# Allegro board ET4207DeMO.brd
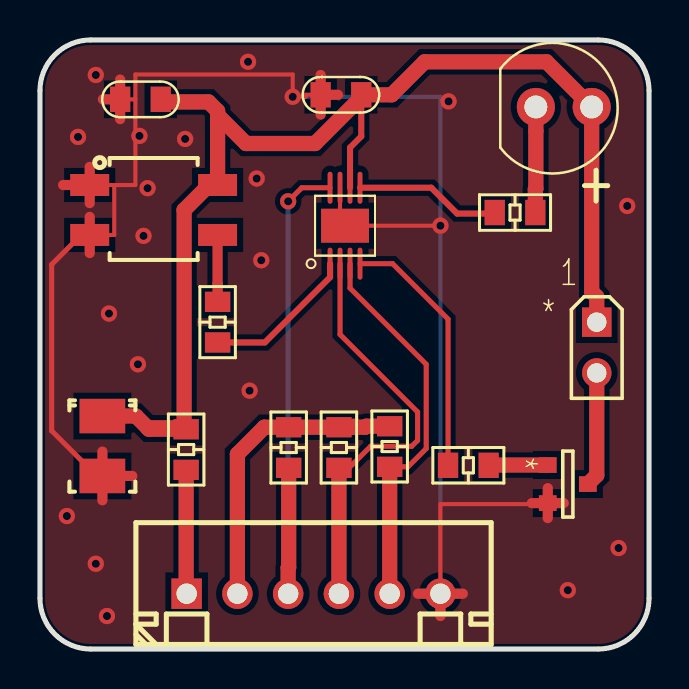
[diagram p0: board, top side]
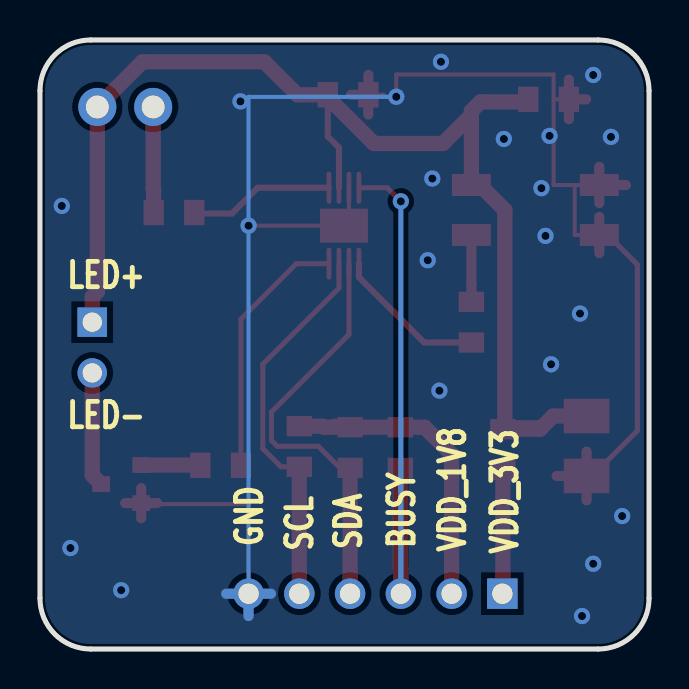
[diagram p1: board, bottom side, seen from below]

Outline 30.48 x 30.48 mm; copper layers: TOP, BOTTOM. Coordinates in mm from the lower left corner of the outline.
Outline path: 0,27.94 0,2.54 arc(0.74,0.74) 2.54,0 27.94,0 arc(29.74,0.74) 30.48,2.54 30.48,27.94 arc(29.74,29.74) 27.94,30.48 2.54,30.48 arc(0.74,29.74) 0,27.94

## Placement (name value [footprint] x y rotation side)
C6  0.1uF  [SC0805]  5.03 27.51 180 top
C7  0.1uF  [SC0805]  15.06 27.74 180 top
CT2  22uF  [STC3528A]  3.12 10.16 270 top
D7  LED  [LED_0805D]  24.82 27.13 0 top
J1  CON6  [HX6V]  7.34 2.77 90 top
J13  HEADER_2  [HDR_THVT_1X2_100_M]  27.86 16.36 0 top
Q1  BSS138LT3G  [SOT_23_321]  26.42 8.26 270 top
R8  100R  [SR0805]  8.89 16.36 90 top
R14  2R2  [SR0805]  23.77 21.84 180 top
R15  0R  [SR0805]  7.32 9.98 270 top
R16  4K7  [SR0805]  17.5 10.13 90 top
R17  4K7  [SR0805]  12.45 10.08 90 top
R18  4K7  [SR0805]  14.96 10.08 90 top
R19  4K7  [SR0805]  21.44 9.19 180 top
U1  ET4003YD  [DFN8]  13.77 19.68 0 top
U3  HIM-H600  [LEDSC254P435X510X80-4N]  5.69 22.02 0 top

## Library data of the parts
C6 C7 = CAPACITOR NON-POL
CT2 = CAP POL
D7 = LED_3
J1 = CON6
J13 = HEADER_1X2
Q1 = MOSFET_I_EN_GSD
R8 R14-R19 = RESISTOR
U1 = LPC111x_8
U3 = LPC111x_7

## Footprints (pads in the part's own frame, mm; a bottom-side part is the same pattern mirrored in y, then rotated)
DFN8
  oval 0.24x1.6 smd: 1(0.75,-0.4) 2(1.25,-0.4) 3(1.75,-0.4) 4(2.25,-0.4) 5(2.25,3.4) 6(1.75,3.4) 7(1.25,3.4) 8(0.75,3.4)
  rect 2.4x1.7 smd: 9(1.5,1.5)
HDR_THVT_1X2_100_M
  rect 1.473x1.473 hole 0.965: 1(0,0)
  round 1.473 hole 0.965: 2(0,-2.54)
HX6V
  rect 1.524x1.524 hole 1.016: 1(0,0)
  round 1.524 hole 1.016: 2(0,-2.54) 3(0,-5.08) 4(0,-7.62) 5(0,-10.16) 6(0,-12.7)
LED_0805D
  round 1.905 hole 1.143: 1(2.794,0) 2(0,0)
LEDSC254P435X510X80-4N
  rect 1.95x1.1 smd: 1(-3.2,1.2) 2(-3.2,-1.3) 3(3.2,-1.3) 4(3.2,1.2)
SC0805
  rect 1.016x1.27 smd: 1(-1.016,0) 2(1.016,0)
SOT_23_321
  rect 0.787x0.889 smd: 1(-0.953,-1.003) 2(0.953,-1.003) 3(0,1.003)
SR0805
  rect 1.016x1.27 smd: 1(-1.016,0) 2(1.016,0)
STC3528A
  rect 1.727x2.286 smd: 1(-1.499,0) 2(1.499,0)

## Nets
GND: C6.2 C7.2 CT2.2 J1.6 Q1.2(S) U1.7(GND) U1.9(GND1) U3.1(GND1) U3.2(GND2)
VDD_1V8: J1.2 R16.2 R17.2 R18.2
VDD_3V3: C6.1 C7.1 CT2.1 D7.1(ANODE) J13.1 R15.1 U1.6(VDD) U3.4(VDD)
BUSY: J1.3 R17.1 U1.8(BUSY)
PWMIN: R8.1 U1.1(PWMI)
PWMOUT: R19.2 U1.4(PWMOUT)
RMT: R14.2 U1.5(RMT)
SCL: J1.5 R16.1 U1.3(SDA)
SDA: J1.4 R18.1 U1.2(SCL)
N16875034: J13.2 Q1.3(D)
N16884907: D7.2(CATHODE) R14.1
N16886282: Q1.1(G) R19.1
N168837622: R8.2 U3.3(OUT)
N168851481: J1.1 R15.2

## Via types
v1: diameter 0.813, hole 0.406, TOP to BOTTOM, 22 vias

## Routing (per net, layer and track width the routed paths; a pad name or vN(x,y) marks a point on that pad's centre or on a via; arc(x,y) is an arc through that point)
GND: length 111
  TOP w0.203: 25.92,7.25 20.04,7.25 J1.6 ; 3.72,23.22 3.72,20.72 U3.2 ; 3.72,23.22 U3.1 ; 3.72,23.22 4.78,23.22 4.78,27.51 ; 4.78,27.51 4.78,28.75 12.65,28.75 v1(12.65,27.64) 13.28,27.64 13.28,27.74 C7.2 ; 4.78,27.51 C6.2 ; U1.7 15.02,21.19 U1.9 v1(20.04,21.19)
  TOP w0.254: CT2.2 2.84,8.66 0.58,10.92 0.58,19.24 2.06,20.72 U3.2
  TOP w0.508: 1.16,23.22 U3.1 ; U3.1 2.49,24.13 ; U3.1 2.49,22.32 ; C6.2 4.01,28.5 ; C6.2 3.15,27.51 ; C6.2 4.01,26.52 ; 2.49,21.63 U3.2 2.49,19.82 ; Q1.2 26.21,7.3 ; Q1.2 24.61,7.3 ; Q1.2 25.41,8.05 ; Q1.2 25.41,6.55 ; C7.2 14.05,28.73 ; C7.2 14.91,27.74 ; C7.2 14.05,26.75 ; 3.12,7.44 CT2.2 ; CT2.2 3.12,9.88 ; CT2.2 4.62,8.66 ; 18.92,2.77 J1.6 ; J1.6 20.04,1.65 ; J1.6 21.16,2.77
  BOTTOM w0.203: J1.6 v1(20.04,21.19) 20.04,27.64 v1(12.65,27.64)
  BOTTOM w0.508: 20.04,1.65 J1.6 ; J1.6 21.16,2.77 ; J1.6 18.92,2.77
  vias: v1(1.35,6.65) v1(1.91,25.63) v1(2.79,28.73) v1(2.79,4.27) v1(3.35,1.65) v1(3.45,16.79) v1(4.9,14.25) v1(4.98,25.68) v1(5.18,20.68) v1(5.38,23.06) v1(7.26,25.53) v1(10.41,29.39) v1(10.49,12.93) v1(10.85,23.55) v1(11.07,19.46) v1(20.45,27.41) v1(26.42,2.95) v1(28.96,5.05) v1(29.39,22.17)
VDD_1V8: length 15.9
  TOP w0.508: 15.7,11.15 16.33,11.15
  TOP w0.762: 15.65,11.1 16.28,11.1 16.33,11.15 R16.2 ; 15.65,11.1 R18.2 R17.2 11.23,11.1 9.88,9.75 J1.2 ; 15.65,11.1 15.7,11.15
VDD_3V3: length 64
  TOP w0.305: U1.6 15.52,25.1 16.08,25.66 16.08,27.61
  TOP w0.762: 8.89,26.72 8.89,26.92 8.43,27.38 6.17,27.38 C6.1 ; 8.89,26.72 10.31,25.3 13.77,25.3 16.08,27.61 C7.1 17.6,27.74 19.25,29.39 25.35,29.39 D7.1 27.61,17.88 27.86,17.63 J13.1 ; 8.89,26.72 U3.4 8.46,23.22 7.21,21.97 7.21,11.1 ; 5.38,11.07 5.46,11 R15.1 7.21,11.1 ; 5.38,11.07 7.21,11.07 7.21,11.1 ; 5.38,11.07 4.8,11.66 CT2.1
BUSY: length 33.3
  TOP w0.203: 12.42,9.02 12.42,4.06
  TOP w0.254: v1(12.42,22.41) 13.1,23.09 U1.8
  TOP w0.762: R17.1 12.45,4.09 12.42,4.06 J1.3
  BOTTOM w0.254: v1(12.42,22.41) J1.3
PWMIN: length 7.7
  TOP w0.305: U1.1 14.52,18.6 11.25,15.34 R8.1
PWMOUT: length 12.9
  TOP w0.254: U1.4 17.65,19.28 20.42,16.51 R19.2
RMT: length 7.3
  TOP w0.305: R14.2 22.71,21.79 20.88,21.79 19.58,23.09 U1.5
SCL: length 19.4
  TOP w0.254: U1.3 15.52,18.06 19.33,14.25 19.33,10.03 18.41,9.12 R16.1
  TOP w0.762: R16.1 J1.5
SDA: length 21.3
  TOP w0.254: U1.2 15.02,15.74 18.9,11.86 18.9,10.44 18.61,10.15 16.55,10.15 15.47,9.07 R18.1
  TOP w0.762: R18.1 J1.4
N16875034: length 5.7
  TOP w0.762: Q1.3 27.86,8.7 J13.2
N16884907: length 8.2
  TOP w0.203: 24.82,25.92 24.79,25.92 24.79,23.01
  TOP w0.762: R14.1 24.79,23.01 24.82,23.04 D7.2
N16886282: length 7.7
  TOP w0.203: 23.22,9.19 23.22,9.16 25.2,9.16
  TOP w0.254: R19.1 25.16,9.19 25.2,9.16
  TOP w0.762: R19.1 22.47,9.21 Q1.1
N168837622: length 3.3
  TOP w0.508: U3.3 8.89,18.29 R8.2
N168851481: length 6.2
  TOP w0.762: J1.1 7.32,2.79 R15.2

## Copper pours and planes (outline as drawn; the poured copper is in the pictures)
GND on TOP: 30.23,2.54 29.56,0.92 27.94,0.25 2.54,0.25 0.92,0.92 0.25,2.54 0.25,27.94 0.92,29.56 2.54,30.23 27.94,30.23 29.56,29.56 30.23,27.94 ; 2 cut-outs
GND on BOTTOM: 30.23,2.54 29.56,0.92 27.94,0.25 2.54,0.25 0.92,0.92 0.25,2.54 0.25,27.94 0.92,29.56 2.54,30.23 27.94,30.23 29.56,29.56 30.23,27.94

## Text on the board
Ref Des/Silkscreen Bottom: LED+ | LED- | VDD_3V3 | VDD_1V8 | BUSY | SDA | SCL | GND
